# Altium PCB ESP unit.PcbDoc (part 2 of 2)
Units mil, origin at the board's own origin, x right, y up, seen from the top; angles counter-clockwise.
Board outline 2203 x 1101 mil, 2 copper layers (Top Layer, Bottom Layer); 42 components, 65 nets, 171 pads, 86 vias.
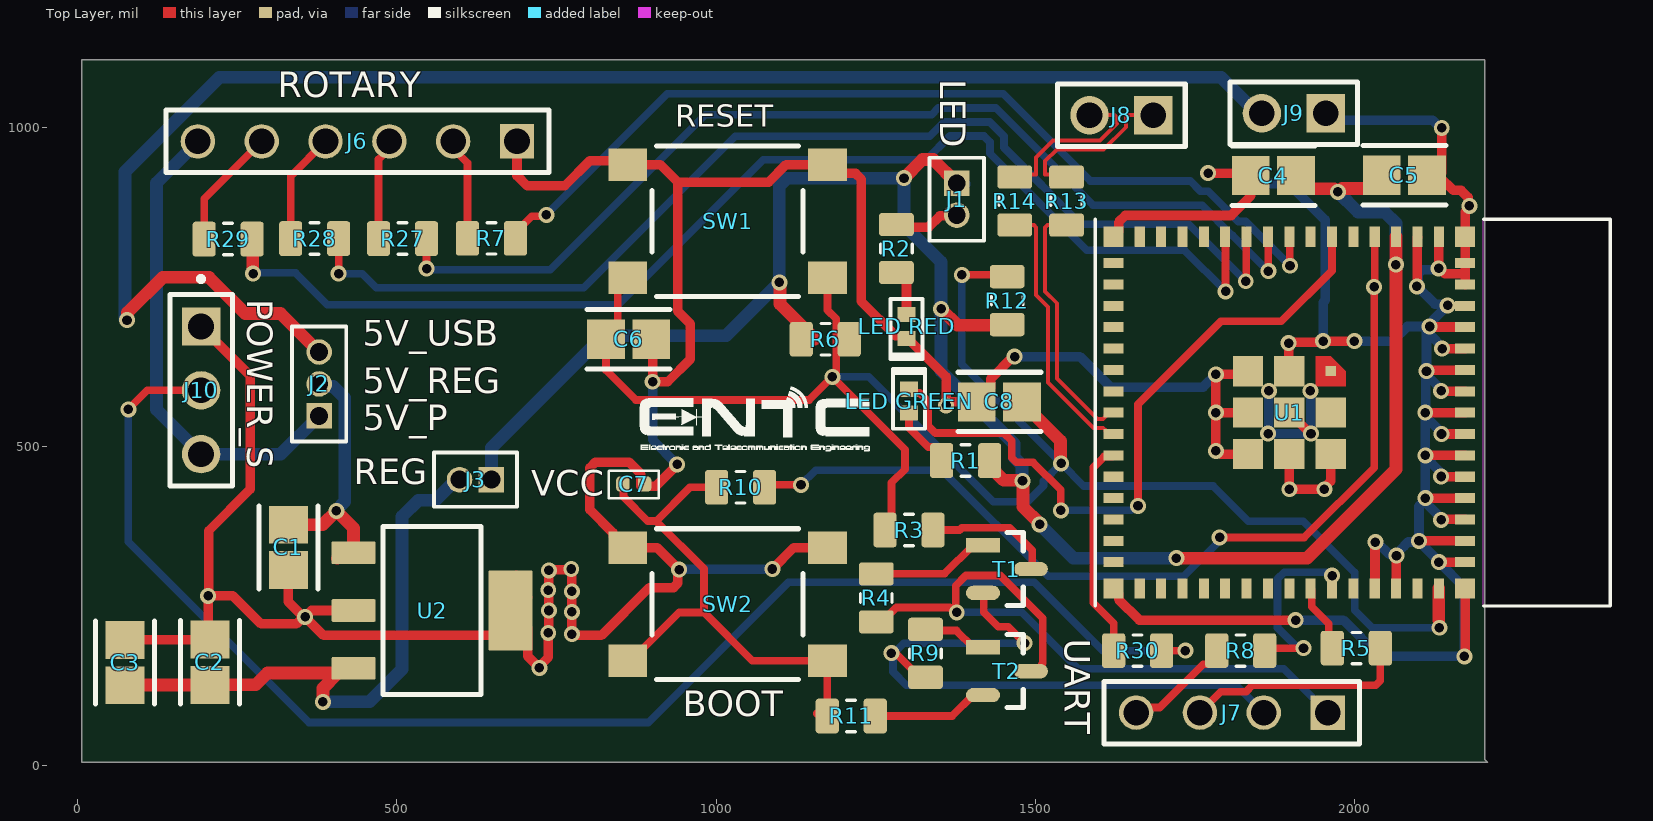
[diagram p0: Top Layer view]

## Part data (continued)
SW1 SW2: library part PTS645SH50SMTR92LFS, "SWITCH TACTILE SPST-NO 0.05A 12V", Contact Current(DC)-Max=50mA, Contact DC Max Rating R Load=0.05A@12VDC, Contact Resistance=0.1mR, Contact Voltage(DC)-Max=12V, Dielectric Withstand Volts=250VACV, Insulation Resistance=100GR, LCSC Part Number=C285479, Manufacturer="ITT C&K", Manufacturer Series=PTS645, Max Operating Temperature=60°C, Min Operating Temperature=-20°C, Supplier Part Number=CKN9085CT-ND, Actuator Type=Pushbutton, Body Breadth=5.9944mm, Body Height=3.4544mm, Body Length or Diameter=5.9944mm, Category="Tactile Switches", ComponentLink1Description=https://datasheet.ciiva.com:443/pdfs/VipMasterIC/IC/CKCI/CKCI-S-A0001796527/CKCI-S-A0001796842-1.pdf?src-supplier=IHS+Markit, ComponentLink1URL=https://datasheet.ciiva.com:443/pdfs/VipMasterIC/IC/CKCI/CKCI-S-A0001796527/CKCI-S-A0001796842-1.pdf?src-supplier=IHS+Markit, ComponentLink2Description=https://datasheet.ciiva.com/29903/getdatasheetpartid-773702-29903807.pdf?src-supplier=Verical, ComponentLink2URL=https://datasheet.ciiva.com/29903/getdatasheetpartid-773702-29903807.pdf?src-supplier=Verical, ComponentLink3Description=https://datasheet.ciiva.com/14920/pts645-14920741.pdf?src-supplier=Digikey, ComponentLink3URL=https://datasheet.ciiva.com/14920/pts645-14920741.pdf?src-supplier=Digikey, ComponentLink4Description=https://datasheet.ciiva.com/22637/1707731-22637356.pdf?src-supplier=Element14, ComponentLink4URL=https://datasheet.ciiva.com/22637/1707731-22637356.pdf?src-supplier=Element14, JESD-609 Code=e4, Manufacturer Part Number=PTS645SH50SMTR92LFS, Mounting Technology="Surface Mount", PCB Hole Count=4, Pricing="1=0.35, 10=0.3, 25=0.2804, 100=0.251, 250=0.23256, 500=0.21948 (USD)", Reach SVHC Compliant=Yes, RoHS=Yes, RoHS Compliant=Yes, Stock=19612, Supplier=Digikey, Switch Action=MOMENTARY, Switch Function=SPST, Switch Type=Keypad, Terminal Finish=Silver, Terminal Length=0.138inch, Termination=Solder
T1 T2: "TRANS NPN 25V 1.5A SOT-23-3", LCSC Part Number=C164886, Manufacturer=Comchip, Supplier Part Number=641-1790-1-ND, Category=Transistors, ComponentLink1Description=https://datasheet.ciiva.com:443/pdfs/VipMasterIC/IC/COMC/COMC-S-A0004994192/COMC-S-A0004994192-1.pdf?src-supplier=IHS+Markit, ComponentLink1URL=https://datasheet.ciiva.com:443/pdfs/VipMasterIC/IC/COMC/COMC-S-A0004994192/COMC-S-A0004994192-1.pdf?src-supplier=IHS+Markit, ComponentLink2Description="http://www.comchiptech.com/admin/files/product/SS8050-G RevA181526.pdf?src-supplier=Digikey", ComponentLink2URL="http://www.comchiptech.com/admin/files/product/SS8050-G RevA181526.pdf?src-supplier=Digikey", Manufacturer Part Number=SS8050-G, Pricing="1=0.24, 10=0.148, 100=0.0921, 500=0.06754, 1000=0.05958 (USD)", Reach SVHC Compliant=Yes, RoHS=Yes, RoHS Compliant=Yes, Stock=127055, Supplier=Digikey
U1: "SMD module, ESP32-S3FN8, 8 MB SPI flash, PCB antenna", LCSC Part No=C2913206, Manufacturer="Espressif Systems", Supplier Part Number=5407-ESP32-S3-MINI-1-N8CT-ND, Category=LDO, ComponentLink1Description=https://datasheet.octopart.com/ESP32-S3-MINI-1-N8-Espressif-Systems-datasheet-165560562.pdf?src-supplier=TME, ComponentLink1URL=https://datasheet.octopart.com/ESP32-S3-MINI-1-N8-Espressif-Systems-datasheet-165560562.pdf?src-supplier=TME, Manufacturer Part Number=ESP32-S3-MINI-1-N8, Pricing="1=5.28, 10=4.566, 25=4.3196, 100=3.9802, 250=3.7768 (USD)", RoHS=No, Supplier=Digikey
U2: "IC REG LIN 3.3V 1.5A SOT-223-4", Case/Package=SOP, Dropout Voltage1-Max=550mV, Dropout Voltage1-Nom=340mV, Input Voltage Absolute-Max=20V, LCHC Part Number=C181262, Manufacturer="Texas Instruments", Min Input Voltage=3.8V, Operating Temperature, TJ-Max=125°C, Operating Temperature, TJ-Min=-40°C, Output Current1-Max=1.5A, Output Voltage1-Max=3.4V, Output Voltage1-Min=3.2V, Output Voltage1-Nom=3.3V, Package Body Material=Plastic, Package Shape=Rectangular, Peak Reflow Temperature (Cel)=260°C, Supplier Part Number=296-24897-1-ND, Voltage Tolerance-Max=3%, Adjustability=FIXED, Category="Voltage Regulators - Linear", Channels=1, ComponentLink1Description=https://www.ti.com:443/lit/ds/symlink/tl1963a.pdf?src-supplier=IHS+Markit, ComponentLink1URL=https://www.ti.com:443/lit/ds/symlink/tl1963a.pdf?src-supplier=IHS+Markit, ComponentLink2Description=https://datasheet.ciiva.com/2046/-2046068.pdf?src-supplier=Digikey, ComponentLink2URL=https://datasheet.ciiva.com/2046/-2046068.pdf?src-supplier=Digikey, Height - Seated (Max)=1.8mm, JESD-30 Code=R-PDSO-G4, JESD-609 Code=e3, Length=6.5mm, Manufacturer Part Number=TL1963A-33DCYR, Max Supply Voltage=20V, Moisture Sensitivity Level=2, Number of Outputs=1, Packaging="Tape and Reel", Pins=4, Pricing="1=2.77, 10=2.069, 25=1.8936, 100=1.7, 250=1.60772, 500=1.55212, 1000=1.50634 (USD)", Qualification Status="Not Qualified", Reach SVHC Compliant=Yes, Regulator Type="FIXED POSITIVE SINGLE OUTPUT LDO REGULATOR", RoHS=Yes, RoHS Compliant=Yes, Stock=629, Supplier=Digikey, Surface Mount=Yes, Technology=BIPOLAR, Terminal Finish=Tin, Terminal Form="Gull Wing", Terminal Pitch=2.3mm, Terminal Position=DUAL, Width=3.5mm

## Via types
v1: diameter 25, hole 15, Top Layer to Bottom Layer, tented both sides, 86 vias

## Nets (pads, with @x,y where several pads share a name; then routed paths per layer and width w, separated by ;. In a path a pad name is that pad's centre, name@x,y a point inside that pad or via, vN(x,y) a via of type N, cw(c..) or ccw(c..) an arc to the next point about the centre after c; other vN are vias at no path point)
3V3_REG: C2.2 C3.2 J3.2 U2.3 | length 893
  Top Layer w20: C3.2 74.27,126.27 206.73,126.27 C2.2 278.54,126.54 297,145 405.93,145 406.86,144.07 384,121.21 v1(384,100)
  Bottom Layer w20: v1(384,100) 457,100 508,151 508,390.28 533.6,415.89 560.48,415.89 592.59,448 J3.2
5V_IN: J2.1 J6.6 J10.3 | length 755.8
  Bottom Layer w20: J6.6 123,913 123,558 J10.3 318,488 J2.1
5V_REG: C1.2 J2.2 U2.1 | length 429.3
  Top Layer w10: J2.2 J2.2@386.12,598
  Top Layer w20: C1.2 383.46,377.46 v1(405,399) 431.97,372.03 U2.1 415.24,333.55 U2.1@406.54,324.86
  Bottom Layer w20: J2.2 381.83,594.17 400.11,594.17 418,576.28 418,413.35 405,400.35 v1(405,399)
5V_USB: J2.3 J9.2 | length 2471.8
  Top Layer w20: v1(77,698) 77.96,698.96 77.96,709.96 133,765 205.57,765 262.15,708.41 317.59,708.41 J2.3
  Bottom Layer w20: v1@74,699 74,930.42 221.98,1078.4 1791.12,1078.4 J9.2@1846.52,1023
+VCC_3V3: C4.2 C5.2 J1.1 J3.1 R1.2 R6.2 R12.2 U1.3 | length 3366.2
  Top Layer w20: v1(1099,757) 1099.96,756.04 1099.96,723.21 1153.35,669.81 1153.35,668.63 1153.98,668 ; v1(1294.34,920.32) 1323.46,949.44 1340.02,949.44 J1.1 ; v1(1352.45,715.6) 1378.05,690 R12.2@1459.63,690 ; R1.2 1428.59,468.94 1450.58,446.96 1479.04,446.96 v1(1480,446) 1480.96,445.04 1480.96,405.4 1507,379.35 v1(1507,378) ; v1(1721,325) 1925.77,325 2065,464.23 v1(2065,785) 2065.32,785.32 U1.3 ; C4.2 1908.57,923.24 1928.19,903.63 1968.02,903.63 1972.65,899 1975.35,899 1980.72,904.37 2042.13,904.37 C5.2@2062.02,924.26
  Bottom Layer w20: J3.1 648,498 823.5,673.5 1015.5,673.5 v1(1099,757) 1099,908.61 1110.72,920.32 v1(1294.34,920.32) 1294.34,847.02 1352.45,788.9 v1(1352.45,715.6) ; v1@1352.45,714.25 1352.45,618.39 1467,503.84 1467,482.63 1479.04,470.59 1479.04,446.96 v1(1480,446) ; J1.1@1378.83,901.27 J1.1@1388.83,911.27 ; v1(1507,378) 1560,325 v1(1721,325) ; v1(1974,899) 2005.54,867.46 2047.41,867.46 2065,849.87 v1(2065,785)
BTN_GPIO0: C7.2 R10.1 R11.2 SW2.1 SW2.2 | length 861.1
  Top Layer w12: C7.2 854.88,440.12 854.88,421.28 892.99,383.17 906.13,383.17 ; SW2.2 866.43,164.42 942.01,240 981,240 ; R10.1 959.03,436.07 906.13,383.17 ; R11.2@1157.49,81.54 R11.2@1172.17,66.86 ; R11.2 1174.06,163.98 SW2.1 1056.58,164.42 981,240 ; 906.13,383.17 981,308.31 981,240
CHIP_PU: C6.2 C8.2 R3.2 R6.1 R12.1 SW1.1 SW1.2 U1.45 | length 2824.9
  Top Layer w12: C6.2 827.54,619.41 874.02,572.93 1145.93,572.93 v1(1182,609) ; C6.2@846.07,668 846.07,748.98 SW1.2 ; SW1.1 1174.5,713.76 1188,700.25 1188,615 v1(1182,609) ; R3.2 1274.65,379.18 1274.65,443.17 1295.99,464.51 1295.99,495.01 v1(1182,609) ; v1(1384.95,769.01) R12.1@1455.1,769.01
  Top Layer w20: C8.2@1460.84,569.93 1478.36,569.93 1539.59,508.71 1539.59,474.41 v1(1540.54,473.46) ; v1@2132.25,228.25 U1.45
  Bottom Layer w12: v1(1182,609) 1238.91,609 1434.41,413.5 1487.81,413.5 1512.93,438.63 1512.93,445.84 v1(1540.54,473.46) ; v1(1384.95,769.01) 1384.95,629.05 v1(1540.54,473.46) ; v1(2133,216) 2028,216 2000.5,243.5 2000.5,302.5 1920,383 1834,383 1779,438 1576,438 v1(1540.54,473.46)
DTR_UART: J7.1 R4.1 T2.3 | length 1095.8
  Top Layer w12: R4.1 1260.09,225.24 1282.54,247.7 1365.87,247.7 1373.5,240.08 v1(1377.02,240.08) 1375.44,241.65 1375.44,281.89 1391.41,297.86 1444.9,297.86 1511.82,230.94 1511.82,160.29 1510.47,158.94 1510.47,152.86 1505.6,148 T2.3
  Bottom Layer w12: v1(1377.02,240.08) 1478.52,240.08 1566.93,151.67 1889.33,151.67 J7.1
GND: "LED RED.1" C1.1 C2.1 C3.1 C4.1 C5.1 C6.1 C7.1 C8.1 J6.1 J9.1 J10.1 SW1.3 SW1.4 SW2.3 SW2.4 U1.1 U1.2 U1.42 U1.43 U1.46 U1.47 U1.48 U1.49 U1.50 U1.51 U1.52 U1.53 U1.54 U1.55 U1.56 U1.57 U1.58 U1.59 U1.60 U1.61 U1.62 U1.63 U1.64 U1.65 U1.66 U1.67 U1.68 U1.69 U1.70 U1.71 U1.72 U1.73 U2.2 U2.4 | length 9574.8
  Top Layer w15: C3.1 74.54,197.46 C2.1 204,200.46 v1(204,266) ; J10.1 270,611 270,433 205,368 205,267 v1(204,266) ; C1.1 329.77,306.31 329.77,256.52 v1@353.29,233 ; U2.2 366,243 v1(356,233) ; U2.4@687,298.49 689.74,295.76 U2.4@702.24,295.76 ; J6.1 688,924.3 703.79,908.51 762.84,908.51 802.21,947.88 855.2,947.88 SW1.4 912.42,941.58 940,914 ; U2.4@699.03,269.95 U2.4@704.98,264 ; C6.1@900.64,659.64 v1(900.64,601.43) 924.26,601.43 959.69,636.86 959.69,691.98 940,711.67 940,914 ; v1(939,472) 939,471 906,438 882.13,438 882.13,456.76 863.45,475.44 811,475.44 802.21,466.65 802.21,400.87 838.49,364.59 838.49,359.67 856.58,341.58 SW2.4 907.42,341.58 v1(942,307) 940.09,305.09 940.09,285.87 933.21,279 895.24,279 820.32,204.09 775.91,204.09 v1(774,206) v1(774,241) v1(774,273) 773.5,273.5 773.5,307.5 v1(773,308) 772,307 739,307 v1(738,306) 737.5,305.5 737.5,275.5 v1(737,275) 737.5,274.5 737.5,243.5 v1(738,243) 737.5,242.5 737.5,208.5 v1(737,208) 737,169.71 723,155.71 v1(723,153) 704.98,171.02 704.98,216.05 U2.4 678.03,230.95 651.08,204 385,204 v1(356,233) ; v1(1088,308) 1121.58,341.58 SW2.3 ; 1298.28,669.34 1293.96,673.65 1281.03,673.65 1227.41,727.27 1227.41,919 1218.62,927.79 1188.29,927.79 SW1.3 1109.58,941.58 1082,914 940,914 ; 1300.24,669.34 1360.49,609.09 v1@1360.49,569.93 ; v1(1360.49,564.38) v1@1360.49,569.93 ; v1(1467.57,640.8) 1465.24,640.8 1430.57,606.12 1430.57,592.05 C8.1 v1@1360.49,569.93 ; U1.64 1630.66,269.16 1630.66,260.34 1663,228 v1(1908,228) ; U1.63 1630.66,836.84 1630.66,851.57 1640.93,861.84 1806.84,861.84 1837.65,892.65 C4.1 ; v1(1770.72,928.2) C4.1@1830.24,928.2 ; U1.73 1790.67,488.04 1785.71,493 v1(1783,493) v1(1783,553) ; U1.72 v1(1783,553) ; U1.71 1828.08,613 v1(1783,613) v1(1783,553) ; U1.70 v1(1898,433) v1(1953,433) 1953,435.71 1962.96,445.67 U1.68 ; U1.61 1931,520 v1(1932,520) ; U1.69 1897,618.96 v1(1897,662) 1898.5,663.5 1949.5,663.5 v1(1951,665) v1(2000,665) ; v1@1928.96,587 v1(1931,587) v1@1931,586 ; U1.66@1955.75,611.75 1956.75,611.75 U1.66 ; U1.42 2032.23,277.78 2032.23,349.23 v1(2033,350) ; U1.43 2065.66,277.75 2065.66,328.66 v1(2066,329) ; v1(2098,751) 2098.41,751.41 2098.41,827.47 U1.2@2098.89,827.95 ; v1@2101,352 v1(2101.21,352.21) U1.47 ; v1(2111,553) U1.53 ; v1(2111.07,486.07) U1.51 ; v1(2111.14,419.14) U1.49 ; v1(2113,618) 2114.56,619.56 2173.22,619.56 U1.55 ; v1(2118,688) 2118.77,687.23 2173.22,687.23 U1.57 ; v1(2132.25,318.75) U1.46 ; U1.1 2132.25,779.25 v1(2132,779) 2133.47,779 2141.95,770.52 2173.59,770.52 ; v1(2136,385) 2136.68,385.68 U1.48 ; v1(2136,453) 2136.39,452.61 U1.50 ; v1(2136,587) 2136.54,586.46 U1.54 ; v1(2136.46,519.54) U1.52 ; v1(2136.86,999.06) 2136.86,928.17 2132.95,924.26 2132.95,923.24 2155.07,901.13 2167.2,901.13 2178.25,890.08 2178.25,878.93 v1(2180.17,877.02) 2180.17,874.31 2173.59,867.73 U1.62 U1.60 2173.59,770.52 ; v1(2137.61,653.39) U1.56 ; v1@2171,170 v1(2172.3,171.3) 2173.59,172.59 U1.65 ; U1.59 2173.59,770.52 ; v1(204,266) 243,266 287,222 342.29,222 v1@353.29,233 ; v1@353.29,233 v1(356,233)
  Bottom Layer w15: v1(900.64,601.43) 900.64,510.36 v1(939,472) ; v1(942,307) 942.5,307.5 1087.5,307.5 v1(1088,308) ; v1(1467.57,640.8) 1569.93,640.8 1617.72,593 1763,593 v1(1783,613) ; v1(1770.72,928.2) 1840.8,928.2 1857,912 1897,912 1954.01,854.99 1954.01,728.9 1951,725.89 v1(1951,665) ; v1(1866,587) 1865.5,586.5 1865.5,520.5 v1(1865,520) v1(1932,520) 1931.5,520.5 1931.5,586.5 v1(1931,587) ; v1(1908,228) 1982.77,228 2039.47,171.3 v1(2172.3,171.3) 2172.3,278.7 v1(2132.25,318.75) 2132.25,319.96 2101.21,351 v1(2101.21,352.21) ; J9.1 1966,1011 2123.07,1011 2135.01,999.06 v1(2136.86,999.06) ; v1(2000,665) 2060,665 2083,688 v1(2118,688) ; v1(2033,350) 2035.71,350 v1@2054.79,330.91 ; v1(2066,329) 2066,331.71 2078,343.71 2078,344.21 2084.09,350.3 2099.3,350.3 v1(2101.21,352.21) ; v1@2112.91,545.48 2136.46,521.93 v1(2136.46,519.54) ; v1@2113,680.29 v1(2113,618) 2112,617 2112,553.93 v1(2111,553) 2111.04,486.11 v1(2111.07,486.07) 2111.11,486.04 v1@2111.11,483.33 ; v1@2113.06,410.65 2136,387.71 v1(2136,385) ; v1@2114.91,610.79 2136,589.71 v1(2136,587) ; 2119.91,673.79 2137.61,656.1 v1(2137.61,653.39) ; v1@2122.62,697.62 v1(2146,721) 2144.09,722.91 2126.09,722.91 v1(2098,751) 2099.91,752.91 2099.91,770.21 2106.79,777.09 2130.09,777.09 v1(2132,779) ; v1(2136,453) 2134.09,454.91 2134.09,460.35 v1@2111.11,483.33 ; v1(2101.21,352.21) 2101.21,406.51 2111.14,416.44 v1(2111.14,419.14) 2111.11,419.18 v1@2111.11,483.33
GPIO0: R10.2 U1.4 | length 1470.5
  Top Layer w12: R10.2 1079.97,440.01 v1(1132.92,440.01) ; v1(1789,357.5) 1921.5,357.5 2031,467 v1(2031,750) 2031.86,750.86 U1.4
  Bottom Layer w12: v1(1132.92,440.01) 1155.91,463 1353.8,463 1520.3,296.5 1732.81,296.5 1786.51,350.21 1786.51,355.01 v1(1789,357.5)
GPIO1: U1.5 | length 7.9
  Top Layer w12: U1.5@1998.39,820.72 U1.5
GPIO2: "LED GREEN.1" U1.6 | length 1099.6
  Top Layer w12: 1302.21,589.61 1308.02,583.8 1318.84,583.8 1331.99,570.65 1331.99,532.28 1343.1,521.17 1450.68,521.17 1463.17,508.68 1463.17,482.47 1470.19,475.44 1496.4,475.44 1539.81,432.03 1539.81,400.19 v1(1540,400) ; v1(1661,407) 1661,566 1791,696 1885.66,696 1964.93,775.26 U1.6
  Bottom Layer w12: v1(1540,400) 1650.48,400 1657.48,407 v1(1661,407)
GPIO3: U1.7
GPIO8: U1.12
GPIO9: U1.13
GPIO10: U1.14
GPIO11: U1.15
GPIO12: U1.16
GPIO13: U1.17
GPIO14: U1.18
GPIO15: U1.19
GPIO16: U1.20
GPIO17: U1.21
GPIO18: U1.22
GPIO26: U1.26
GPIO33: U1.28
GPIO34: U1.29
GPIO35: U1.31
GPIO36: U1.32
GPIO37: U1.33
GPIO38: U1.34
GPIO39: U1.35
GPIO40: U1.36
GPIO41: U1.37
GPIO42: U1.38
GPIO45: U1.41
GPIO46: U1.44
GPIO47: U1.27
GPIO48: U1.30
GPIO_D_N: J8.1 R13.1 | length 264.2
  Top Layer w6.23: R13.1 1545.15,925.85 1515.61,925.85 1515.61,946.96 1533.96,965.31 1607.24,965.31 1642.11,1000.18 1642.11,1015.35 1645.76,1019 J8.1
GPIO_D_P: J8.2 R14.1 | length 264.1
  Top Layer w6.23: R14.1 1471.65,925.85 1501.39,925.85 1501.39,952.85 1528.07,979.54 1601.35,979.54 1627.89,1006.08 1627.89,1015.35 1624.24,1019 J8.2
GPIO_N: R13.2 U1.23 | length 398.6
  Top Layer w6.23: R13.2 1548.8,847 1519.26,847 1515.61,843.35 1515.61,743.11 1534.34,724.38 1534.34,606.36 1597.32,543.38 1606.13,543.38 1609.78,547.03 1609.78,548.24 1614.54,553 U1.23
GPIO_P: R14.2 U1.24 | length 422.1
  Top Layer w6.23: R14.2 1497.74,847 1501.39,843.35 1501.39,737.21 1520.11,718.49 1520.11,600.46 1591.42,529.15 1606.13,529.15 1609.78,525.5 1609.78,524.29 1614.54,519.54 U1.24
LED_1: J6.2 R7.1 | length 161.3
  Top Layer w12: J6.2 588,966.65 610.4,944.25 R7.1
NetJ1_2: J1.2 R2.2 | length 82.1
  Top Layer w15: R2.2@1302.21,843.75 1333.04,843.75 1350.56,861.27 J1.2@1377.02,861.27
"NetLED GREEN_2": "LED GREEN.2" R1.1 | length 100.7
  Top Layer w12: 1302.21,552.21 1302.21,529.18 1332.23,499.17 1341.28,499.17 1353.39,487.06 R1.1
"NetLED RED_2": "LED RED.2" R2.1 | length 63.4
  Top Layer w15: 1298.28,706.74 1298.28,764.61 R2.1@1302.21,768.55
NetR3_1: R3.1 T1.3 | length 201.7
  Top Layer w12: R3.1 1381.29,369.14 1384.81,372.66 1459.79,372.66 1495.19,337.26 1495.19,310.19 T1.3
NetR4_2: R4.2 T1.1 | length 185.7
  Top Layer w12: R4.2 1357.74,300.44 1402.7,345.4 T1.1
NetR7_2: R7.2 U1.8 | length 1470.1
  Top Layer w12: R7.2 685.6,835.06 711.06,860.51 731.51,860.51 v1(734,863) ; U1.8 1898.58,828.01 1898.58,783.72 v1(1899.16,783.14)
  Bottom Layer w12: v1(734,863) 923.4,1052.4 1449.6,1052.4 1586,916 1742.61,916 1758.91,899.7 1770.72,899.7 1817.97,852.45 1829.85,852.45 v1(1899.16,783.14)
NetR9_2: R9.2 T2.1 | length 101.8
  Top Layer w12: R9.2 1330.01,211.58 1376.53,211.58 1402.7,185.4 T2.1
NetR11_1: R11.1 T2.2 | length 182.5
  Top Layer w12: R11.1 1369.91,77.8 1402.7,110.6 T2.2
NetR27_2: R27.2 U1.9 | length 1631.9
  Top Layer w12: v1(546.31,778.59) R27.2 ; U1.9 1864.87,828.26 1864.87,774.99 v1(1865.2,774.65)
  Bottom Layer w12: v1(546.31,778.59) 547.9,777 740,777 983,1020 1337.75,1020 1348.15,1030.4 1437.85,1030.4 1590.56,877.7 1761.61,877.7 1808.86,830.45 1809.41,830.45 v1(1865.2,774.65)
NetR28_2: R28.2 U1.10 | length 1777.2
  Top Layer w12: v1(408.51,770.72) R28.2 ; v1(1829.77,758.91) 1830.42,759.56 1830.42,827.94 U1.10
  Bottom Layer w12: v1(408.51,770.72) 445.29,770.72 467.5,748.5 792.5,748.5 1030,986 1334.86,986 1357.26,1008.4 1428.74,1008.4 1451,986.14 1451,968.39 1571.39,848 1740.68,848 v1(1829.77,758.91)
NetR29_2: R29.2 U1.11 | length 1906.2
  Top Layer w12: U1.11 1797.94,828.26 1797.94,743.49 v1(1798.28,743.16)
  Top Layer w20: R29.2 273.83,824.18 273.83,771.54 v1(274.65,770.72)
  Bottom Layer w12: v1(274.65,770.72) 275.94,772 340.88,772 390.88,722 846.61,722 1073.61,949 1328.97,949 1366.37,986.4 1419.63,986.4 1429,977.03 1429,959.27 1580.6,807.68 1733.76,807.68 v1(1798.28,743.16)
NetR30_1: R30.1 U1.25 | length 339.9
  Top Layer w12: U1.25 1620.54,484.2 1607.75,484.2 1590.66,467.11 1590.66,255.03 1622.88,222.81 R30.1
OUTPUT: J10.2 R30.2 | length 2283.1
  Top Layer w12: v1(79,558) 109,588 J10.2 ; R30.2 v1(1735.28,180.17) v1@1733.12,178
  Bottom Layer w12: v1(79,558) 79,350.69 362.19,67.5 893.46,67.5 1113.37,287.41 1498.28,287.41 1605.52,180.17 v1(1735.28,180.17)
ROTARY_1: J6.3 R27.1 | length 159.2
  Top Layer w12: R27.1 471.11,949.76 488,966.65 J6.3
ROTARY_2: J6.4 R28.1 | length 174.8
  Top Layer w12: R28.1 333.32,923.32 J6.4
RTS_UART: J7.2 R9.1 T1.2 | length 1036.8
  Top Layer w12: v1(1274.65,176.23) 1277.14,173.74 1283.6,173.74 1318.94,138.39 R9.1 ; T1.2 1419.24,269.51 1419.24,240.31 1442.16,217.38 1457.91,217.38 v1(1483.32,191.98)
  Bottom Layer w12: v1(1483.32,191.98) 1293.92,191.98 1278.17,176.23 v1(1274.65,176.23) 1277.14,173.74 1277.14,146.8 1297.97,125.97 1815.03,125.97 J7.2
RXD_UART: J7.3 R5.2 | length 354.4
  Top Layer w12: J7.3 1790.9,115.9 1830.14,115.9 1840.2,125.97 2033.57,125.97 2040.6,133 R5.2
SWITCH: J6.5 R29.1 | length 190.4
  Top Layer w12: R29.1 197.81,887.81 J6.5
TXD_UART: J7.4 R8.2 | length 171.9
  Top Layer w12: J7.4 1666.02,91.02 1695.16,91.02 1763.13,159 1772.19,159 1784.3,171.11 R8.2
UORXD: R8.1 U1.40 | length 305.2
  Top Layer w12: R8.1 1863.43,184.1 v1(1920.32,184.1) ; U1.40 1964.96,277.44 v1(1965,297.7) v1(1965,297.7)
  Bottom Layer w12: v1(1920.32,184.1) 1917.84,186.59 1909.11,186.59 1879.5,216.19 1879.5,292.47 1890.03,303 1956.18,303 1961.48,297.7 v1(1965,297.7)
UOTXD: R5.1 U1.39 | length 115.2
  Top Layer w12: U1.39@1931.46,269.54 U1.39 1933.34,275.54 1933.34,248.84 1959.94,222.24 1959.94,189.56 R5.1

## Silkscreen, mask and mechanical layers (free items; w line width, h text height)
Top Overlay:
  drawing of 52 lines, arcs and shapes, not listed
  text "LED" at 1351.52,1075.74 h40 r270
  text "ROTARY" at 313,1047 h40
  text "RESET" at 936,989 h60
  text "POWER_S" at 265.66,730.96 h40 r270
  text "5V_USB" at 446,657.63 h40
  text "5V_REG" at 446,583.66 h40
  text "5V_P" at 446,525.66 h40
  text "REG" at 432,440.96 h40
  text "VCC" at 710,423 h40
  text "UART" at 1546,198.96 h40 r270
  text "BOOT" at 948,77 h40
Bottom Overlay:
  text "D+" at 1543,876 h40 r270
  text "D-" at 1646,875 h40 r270
  text "R1" at 370,853 h40 r270
  text "GND" at 1938,842 h40 r270
  text "NATIVE" at 1438.13,839.71 h40 r270
  text "SW" at 264,839 h40 r270
  text "R2" at 465,839 h40 r270
  text "LED" at 572,801 h40 r270
  text "GND" at 670,800 h40 r270
  text "5V_P" at 151.66,764 h40 r270
  text "USB_IN" at 2028.66,732 h40 r270
  text "5V_USB" at 1829.66,722 h40 r270
  text "GND" at 372,680 h40
  text "OUT" at 268,534 h40 r270
  text "AuraPlus" at 1353,533 h70
  text "5V_P" at 414,459.66 h40
  text "DTR" at 1942,162 h40 r270
  text "RTS" at 1835,161 h40 r270
  text "TXD" at 1640,157 h40 r270
  text "RXD" at 1740,157 h40 r270
Mechanical 1:
  the board outline again, w4
Board Shape:
  lines w6: 3,3 2203,3 2203,1103 3,1103 3,23 3,3